# Altium PCB Motor_Driver_2021.PcbDoc
Units mm, origin at the board's own origin, x right, y up, seen from the top; angles counter-clockwise.
Board outline 28.07 x 14 mm, 2 copper layers (Top Layer, Bottom Layer); 22 components, 20 nets, 94 pads, 0 vias.
Unrouted connection lines stored in the file: 6.
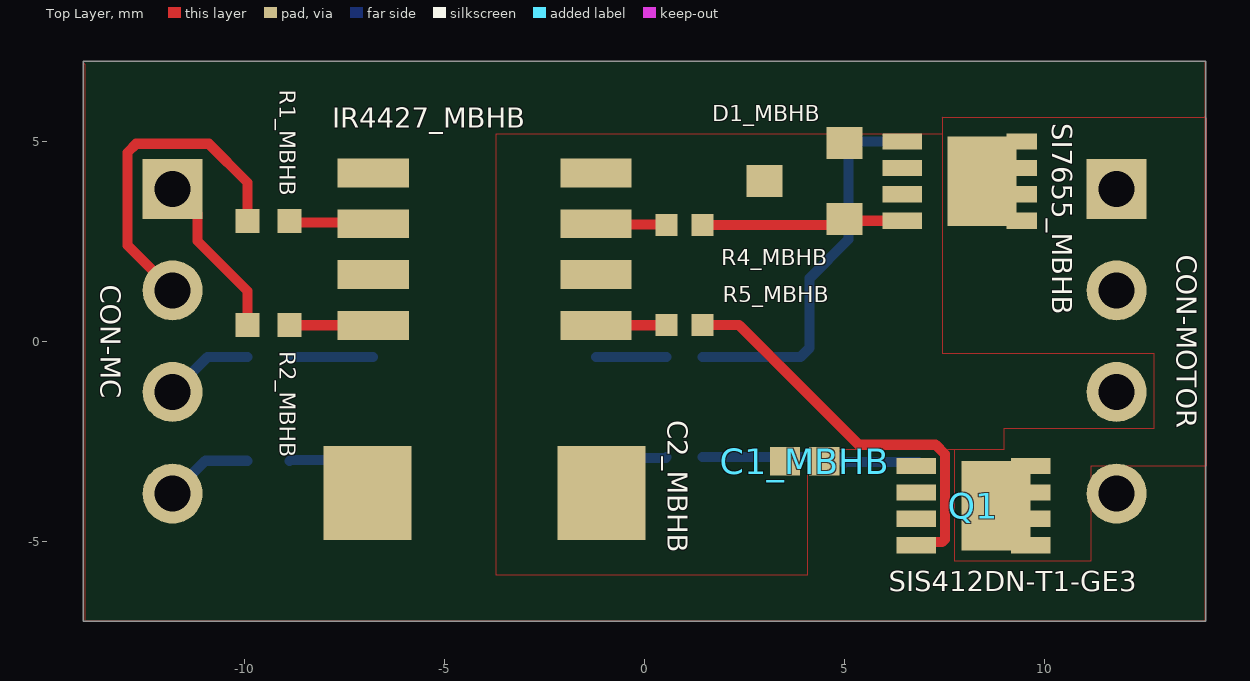
[diagram p0: Top Layer view]
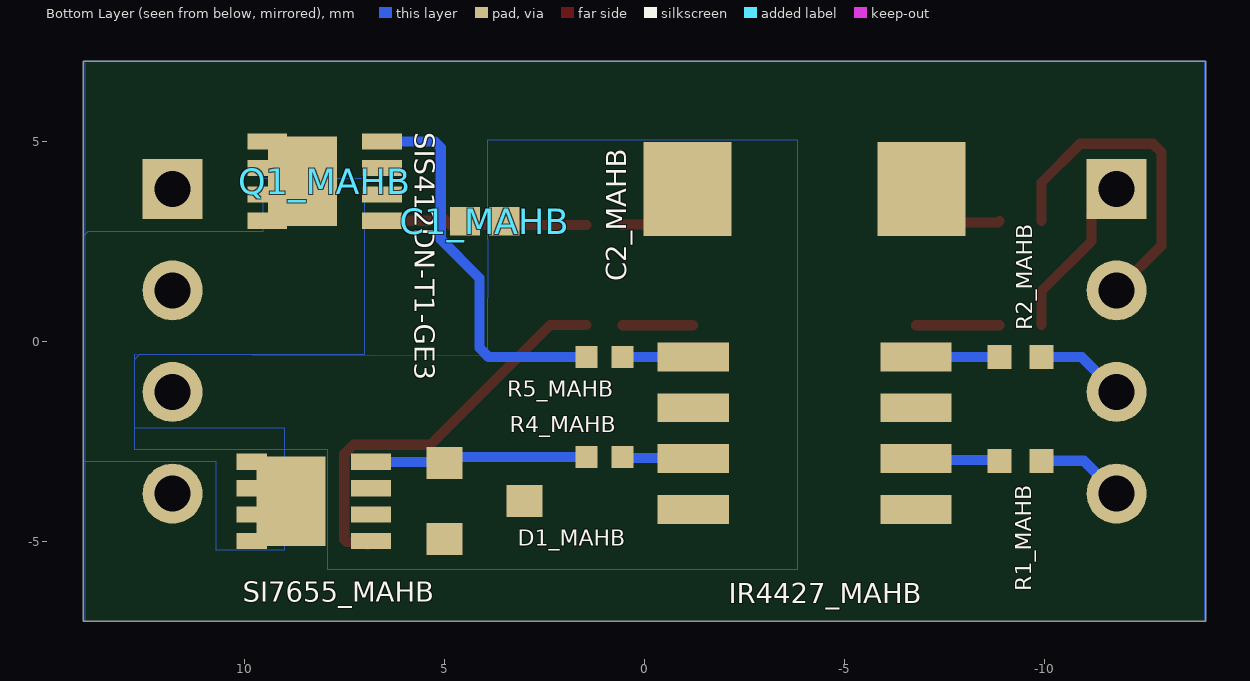
[diagram p1: Bottom Layer view, seen from below]

## Layer stack, top to bottom
Top Solder: solder mask 0.0102, Solder Resist, Dk 3.5
Top Layer: signal copper 0.0356
Dielectric 1: dielectric 0.32, FR-4, Dk 4.8
Bottom Layer: signal copper 0.0356
Bottom Solder: solder mask 0.0102, Solder Resist, Dk 3.5

## Board outline
-14.035,7 -14.035,-7 14.035,-7 14.035,7

## Design rules (kind name [scope] priority, off if disabled: settings)
AssemblyTestPointUsage [All] p0: scope1count=1 scope1_0_kind=Board scope1_0_value=Board scope2count=1 scope2_0_kind=Board scope2_0_value=Board commentlength=0
AssemblyTestpoint [All] p0: scope1count=1 scope1_0_kind=Board scope1_0_value=Board scope2count=1 scope2_0_kind=Board scope2_0_value=Board commentlength=0
Clearance [All] p0: scope1count=1 scope1_0_kind=Board scope1_0_value=Board scope2count=1 scope2_0_kind=Board scope2_0_value=Board commentlength=0 gap=0.1
Clearance [All] p1: gap=0.1 ignorepadtopadclearanceinfootprint=TRUE
ComponentClearance [All] p0: scope1count=1 scope1_0_kind=Board scope1_0_value=Board scope2count=1 scope2_0_kind=Board scope2_0_value=Board commentlength=0 gap=0 collisioncheckmode=3
ComponentClearance [All] p1: gap=0 collisioncheckmode=3 verticalgap=0 showdistances=FALSE
DiffPairsRouting [All] p0: scope1count=1 scope1_0_kind=Board scope1_0_value=Board scope2count=1 scope2_0_kind=Board scope2_0_value=Board commentlength=0
FabricationTestPointUsage [All] p0: scope1count=1 scope1_0_kind=Board scope1_0_value=Board scope2count=1 scope2_0_kind=Board scope2_0_value=Board commentlength=0 valid=0 allowmultiple=FALSE
FabricationTestpoint [All] p0: scope1count=1 scope1_0_kind=Board scope1_0_value=Board scope2count=1 scope2_0_kind=Board scope2_0_value=Board commentlength=0 side=3 testpointundercomponent=TRUE minsize=1.016 maxsize=2.54 preferedsize=1.524 minholesize=0 maxholesize=1.016 preferedholesize=0.813 testpointgrid=0.025
FanoutControl Fanout_BGA [All] p0 off: scope1count=1 scope1_0_kind=Board scope1_0_value=Board scope2count=1 scope2_0_kind=Board scope2_0_value=Board commentlength=69 // Protel DXP Scope 1 Expression Was: IsBGA   Fanout_BGA (Default Rule)
FanoutControl Fanout_LCC [All] p0 off: scope1count=1 scope1_0_kind=Board scope1_0_value=Board scope2count=1 scope2_0_kind=Board scope2_0_value=Board commentlength=69 // Protel DXP Scope 1 Expression Was: IsLCC   Fanout_LCC (Default Rule)
FanoutControl Fanout_SOIC [All] p0 off: scope1count=1 scope1_0_kind=Board scope1_0_value=Board scope2count=1 scope2_0_kind=Board scope2_0_value=Board commentlength=71 // Protel DXP Scope 1 Expression Was: IsSOIC   Fanout_SOIC (Default Rule)
FanoutControl Fanout_Small [All] p0 off: scope1count=1 scope1_0_kind=Board scope1_0_value=Board scope2count=1 scope2_0_kind=Board scope2_0_value=Board commentlength=84 // Protel DXP Scope 1 Expression Was: (CompPinCount < 5)   Fanout_Small (Default Rule)
FanoutControl Fanout_Default [All] p0: scope1count=1 scope1_0_kind=Board scope1_0_value=Board scope2count=1 scope2_0_kind=Board scope2_0_value=Board commentlength=30 // Fanout_Default (Default Rule)
Height [All] p0: scope1count=1 scope1_0_kind=Board scope1_0_value=Board scope2count=1 scope2_0_kind=Board scope2_0_value=Board commentlength=0
HoleSize [All] p0: scope1count=1 scope1_0_kind=Board scope1_0_value=Board scope2count=1 scope2_0_kind=Board scope2_0_value=Board commentlength=0 absolutevalues=TRUE maxlimit=2.54 minlimit=0.025 maxpercent=80.000 minpercent=20.000
HoleToHoleClearance [All] p0: scope1count=1 scope1_0_kind=Board scope1_0_value=Board scope2count=1 scope2_0_kind=Board scope2_0_value=Board commentlength=0
LayerPairs [All] p0: scope1count=1 scope1_0_kind=Board scope1_0_value=Board scope2count=1 scope2_0_kind=Board scope2_0_value=Board commentlength=0 enforce=TRUE
MinimumSolderMaskSliver MinimumSolderMaskSliver_pad_5 [All] p0 off: scope1count=1 scope1_0_kind=Board scope1_0_value=Board scope2count=1 scope2_0_kind=Board scope2_0_value=Board commentlength=80 // Protel DXP Scope 2 Expression Was: (HasFootprint('SIS862DNT1GE3') AND IsPad)
MinimumSolderMaskSliver MinimumSolderMaskSliver_pad_4 [All] p0 off: scope1count=1 scope1_0_kind=Board scope1_0_value=Board scope2count=1 scope2_0_kind=Board scope2_0_value=Board commentlength=79 // Protel DXP Scope 2 Expression Was: (HasFootprint('RESC1005X40N') AND IsPad)
MinimumSolderMaskSliver MinimumSolderMaskSliver_pad_3 [All] p0 off: scope1count=1 scope1_0_kind=Board scope1_0_value=Board scope2count=1 scope2_0_kind=Board scope2_0_value=Board commentlength=88 // Protel DXP Scope 2 Expression Was: (HasFootprint('CAPC1050X55X23ML05T13') AND IsPad)
MinimumSolderMaskSliver MinimumSolderMaskSliver_pad_1 [All] p0 off: scope1count=1 scope1_0_kind=Board scope1_0_value=Board scope2count=1 scope2_0_kind=Board scope2_0_value=Board commentlength=88 // Protel DXP Scope 2 Expression Was: (HasFootprint('RESC1005X40X25LL05T05') AND IsPad)
MinimumSolderMaskSliver MinimumSolderMaskSliver_pad [All] p0 off: scope1count=1 scope1_0_kind=Board scope1_0_value=Board scope2count=1 scope2_0_kind=Board scope2_0_value=Board commentlength=82 // Protel DXP Scope 2 Expression Was: (HasFootprint('POWERPAK-1212-8') AND IsPad)
MinimumSolderMaskSliver MinimumSolderMaskSliver_pad_2 [All] p0 off: scope1count=1 scope1_0_kind=Board scope1_0_value=Board scope2count=1 scope2_0_kind=Board scope2_0_value=Board commentlength=88 // Protel DXP Scope 2 Expression Was: (HasFootprint('RESC1005X40X25NL05T05') AND IsPad)
MinimumSolderMaskSliver [All] p0: scope1count=1 scope1_0_kind=Board scope1_0_value=Board scope2count=1 scope2_0_kind=Board scope2_0_value=Board commentlength=0
MinimumSolderMaskSliver MinimumSolderMaskSliver_pad_2 [(HasFootprint('RESC1005X40X25NL05T05') AND IsPad) vs (HasFootprint('RESC1005X40X25NL05T05') AND IsPad)] p1: minsoldermaskwidth=0
MinimumSolderMaskSliver MinimumSolderMaskSliver_pad_5 [(HasFootprint('SIS862DNT1GE3') AND IsPad) vs (HasFootprint('SIS862DNT1GE3') AND IsPad)] p2: minsoldermaskwidth=0
MinimumSolderMaskSliver MinimumSolderMaskSliver_pad [(HasFootprint('POWERPAK-1212-8') AND IsPad) vs (HasFootprint('POWERPAK-1212-8') AND IsPad)] p3: minsoldermaskwidth=0
MinimumSolderMaskSliver MinimumSolderMaskSliver_pad_1 [(HasFootprint('RESC1005X40X25LL05T05') AND IsPad) vs (HasFootprint('RESC1005X40X25LL05T05') AND IsPad)] p4: minsoldermaskwidth=0
MinimumSolderMaskSliver MinimumSolderMaskSliver_pad_3 [(HasFootprint('CAPC1050X55X23ML05T13') AND IsPad) vs (HasFootprint('CAPC1050X55X23ML05T13') AND IsPad)] p5: minsoldermaskwidth=0
MinimumSolderMaskSliver MinimumSolderMaskSliver_pad_4 [(HasFootprint('RESC1005X40N') AND IsPad) vs (HasFootprint('RESC1005X40N') AND IsPad)] p6: minsoldermaskwidth=0
MinimumSolderMaskSliver [All] p7: minsoldermaskwidth=0.254
NetAntennae [All] p0: scope1count=1 scope1_0_kind=Board scope1_0_value=Board scope2count=1 scope2_0_kind=Board scope2_0_value=Board commentlength=0
PasteMaskExpansion [All] p0: scope1count=1 scope1_0_kind=Board scope1_0_value=Board scope2count=1 scope2_0_kind=Board scope2_0_value=Board commentlength=0 expansion=0
PlaneClearance [All] p0: scope1count=1 scope1_0_kind=Board scope1_0_value=Board scope2count=1 scope2_0_kind=Board scope2_0_value=Board commentlength=0 clearance=0.508
PlaneConnect [All] p0: scope1count=1 scope1_0_kind=Board scope1_0_value=Board scope2count=1 scope2_0_kind=Board scope2_0_value=Board commentlength=0 planeconnectstyle=Relief reliefexpansion=0.508 reliefentries=4 reliefconductorwidth=0.254 reliefairgap=0.254
PolygonConnect "Schematic Polygon Connect Style_1" [All] p0: scope1count=1 scope1_0_kind=Net scope1_0_value=MAOUT scope2count=1 scope2_0_kind=Board scope2_0_value=Board commentlength=0 connectstyle=Direct reliefconductorwidth=0.254 reliefentries=4 polygonreliefangle="45 Angle"
PolygonConnect "Schematic Polygon Connect Style" [All] p0: scope1count=1 scope1_0_kind=Net scope1_0_value=MBOUT scope2count=1 scope2_0_kind=Board scope2_0_value=Board commentlength=0 connectstyle=Direct reliefconductorwidth=0.254 reliefentries=4 polygonreliefangle="45 Angle"
PolygonConnect [All] p0: scope1count=1 scope1_0_kind=Board scope1_0_value=Board scope2count=1 scope2_0_kind=Board scope2_0_value=Board commentlength=0 connectstyle=Direct reliefconductorwidth=0.254 reliefentries=4 polygonreliefangle="90 Angle"
PolygonConnect "Schematic Polygon Connect Style_1" [InNet('MAOUT')] p1: connectstyle=Direct reliefconductorwidth=0.254 reliefentries=4 polygonreliefangle="45 Angle" airgapwidth=0.254
PolygonConnect "Schematic Polygon Connect Style" [InNet('MBOUT')] p2: connectstyle=Direct reliefconductorwidth=0.254 reliefentries=4 polygonreliefangle="45 Angle" airgapwidth=0.254
PolygonConnect [All] p3: connectstyle=Direct reliefconductorwidth=0.254 reliefentries=4 polygonreliefangle="90 Angle" airgapwidth=0.254
RoutingCorners [All] p0: scope1count=1 scope1_0_kind=Board scope1_0_value=Board scope2count=1 scope2_0_kind=Board scope2_0_value=Board commentlength=0 cornerstyle=45-Degree minsetback=2.54 maxsetback=2.54
RoutingLayers [All] p0: scope1count=1 scope1_0_kind=Board scope1_0_value=Board scope2count=1 scope2_0_kind=Board scope2_0_value=Board commentlength=0 top layer=Automatic bottom layer=Automatic
RoutingPriority [All] p0: scope1count=1 scope1_0_kind=Board scope1_0_value=Board scope2count=1 scope2_0_kind=Board scope2_0_value=Board commentlength=0
RoutingTopology [All] p0: scope1count=1 scope1_0_kind=Board scope1_0_value=Board scope2count=1 scope2_0_kind=Board scope2_0_value=Board commentlength=0 topology=Shortest
RoutingVias [All] p0: scope1count=1 scope1_0_kind=Board scope1_0_value=Board scope2count=1 scope2_0_kind=Board scope2_0_value=Board commentlength=0 holewidth=0.711 width=1 viastyle="Through Hole" minholewidth=0.711 minwidth=1 maxholewidth=0.711 maxwidth=1
RoutingVias [All] p1: holewidth=0.711 width=1 viastyle="Through Hole" minholewidth=0.711 minwidth=1 maxholewidth=0.711 maxwidth=1
ShortCircuit [All] p0: scope1count=1 scope1_0_kind=Board scope1_0_value=Board scope2count=1 scope2_0_kind=Board scope2_0_value=Board commentlength=0 allowed=FALSE
SilkToBoardRegionClearance [All] p0: scope1count=1 scope1_0_kind=Board scope1_0_value=Board scope2count=1 scope2_0_kind=Board scope2_0_value=Board commentlength=0
SilkToSilkClearance [All] p0: scope1count=1 scope1_0_kind=Board scope1_0_value=Board scope2count=1 scope2_0_kind=Board scope2_0_value=Board commentlength=0
SilkToSolderMaskClearance [All] p0 off: scope1count=1 scope1_0_kind=Board scope1_0_value=Board scope2count=1 scope2_0_kind=Board scope2_0_value=Board commentlength=44 // Protel DXP Scope 1 Expression Was: IsPad
SolderMaskExpansion [All] p0: scope1count=1 scope1_0_kind=Board scope1_0_value=Board scope2count=1 scope2_0_kind=Board scope2_0_value=Board commentlength=0 expansion=0.102
SolderMaskExpansion [All] p1: expansion=0.102 istentingtop=FALSE
UnRoutedNet [All] p0: scope1count=1 scope1_0_kind=Board scope1_0_value=Board scope2count=1 scope2_0_kind=Board scope2_0_value=Board commentlength=0
UnpouredPolygon [All] p0: scope1count=1 scope1_0_kind=Board scope1_0_value=Board scope2count=1 scope2_0_kind=Board scope2_0_value=Board commentlength=0
Width [All] p0: scope1count=1 scope1_0_kind=Board scope1_0_value=Board scope2count=1 scope2_0_kind=Board scope2_0_value=Board commentlength=0 maxlimit=0.254 minlimit=0.254 preferedwidth=0.254
Width [All] p1: maxlimit=0.254 minlimit=0.254 preferedwidth=0.254
28 further rules are at their usual default settings.

## Classes and differential pairs
channel class Half_Bridge: MAHB MBHB
component class Motor_Driver_2021: CON-MC CON-MOTOR
component class MBHB: C1_MBHB C2_MBHB D1_MBHB IR4427_MBHB R1_MBHB R2_MBHB R4_MBHB R5_MBHB
component class MAHB: C1_MAHB C2_MAHB D1_MAHB IR4427_MAHB Q1_MAHB R1_MAHB R2_MAHB R4_MAHB R5_MAHB SI7655_MAHB

## Components (designator, comment, footprint, x,y, rotation, side; value= is the part's Value field where it differs from the comment)
C1_MAHB "CL05B104KO5NNNC" CAPC1050X55X23ML05T13 4,3 r180 bottom (schematic designator C1)
C1_MBHB "CL05B104KO5NNNC" CAPC1050X55X23ML05T13 4,-3 r180 top (schematic designator C1)
C2_MAHB "T491D475M050AT" KEMT-T491-D_L -4,3.8 r180 bottom (schematic designator C2)
C2_MBHB "T491D475M050AT" KEMT-T491-D_L -4,-3.8 r180 top (schematic designator C2)
CON-MC "" 04x01_Conector_Male -11.8,0 r90 top
CON-MOTOR "22032041" 04x01_Conector_Male 11.8,0 r90 top
D1_MAHB "MMBZ5240B-7-F" Diodes_SOT23_0 4,-4 r270 bottom (schematic designator D1)
D1_MBHB "MMBZ5240B-7-F" Diodes_SOT23_0 4,4 r90 top (schematic designator D1)
IR4427_MAHB "IR4427STRPBF" IR4427-PCB -4,-2.3 r0 bottom (schematic designator IR4427)
IR4427_MBHB "IR4427STRPBF" IR4427-PCB -4,2.3 r0 top (schematic designator IR4427)
Q1 "SIS412DN-T1-GE3" POWERPAK-1212-8 8.223,-4.11 r0 top
Q1_MAHB "SIS412DN-T1-GE3" POWERPAK-1212-8 8,4 r0 bottom (schematic designator Q1)
R1_MAHB "CRCW0402330RFKED" FP-CRCW0402-e3-MFG -9.4,-3 r0 bottom (schematic designator R1)
R1_MBHB "CRCW0402330RFKED" FP-CRCW0402-e3-MFG -9.4,3 r0 top (schematic designator R1)
R2_MAHB "CRCW0402330RFKED" FP-CRCW0402-e3-MFG -9.4,-0.4 r0 bottom (schematic designator R2)
R2_MBHB "CRCW0402330RFKED" FP-CRCW0402-e3-MFG -9.4,0.4 r0 top (schematic designator R2)
R4_MAHB "ERJ-2RKF1500X" RESC1005X40X25NL05T05 1,-2.9 r0 bottom (schematic designator R4)
R4_MBHB "ERJ-2RKF1500X" RESC1005X40X25NL05T05 1,2.9 r0 top (schematic designator R4)
R5_MAHB "ERJ-2RKF1500X" RESC1005X40X25NL05T05 1,-0.4 r0 bottom (schematic designator R5)
R5_MBHB "ERJ-2RKF1500X" RESC1005X40X25NL05T05 1,0.4 r0 top (schematic designator R5)
SI7655_MAHB "SI7655DN-T1-GE3" SIS862DNT1GE3 8.395,-4.003 r0 bottom (schematic designator SI7655)
SI7655_MBHB "SI7655DN-T1-GE3" SIS862DNT1GE3 8,4 r0 top (schematic designator SI7655)

## Footprints (in the part's own frame and the unit in brackets; to place one, negate y for a bottom-side part, rotate by r counter-clockwise, add the part's x,y. Pads: shape width x height; smd on the part's side, far side on the other; paste and mask are expansions set on the pad)
04x01_Conector_Male [mm] "0022032041"
  rect 1.5x1.5 hole 0.9: 1(3.81,0)
  round 1.5 hole 0.9: 2(1.27,0) 3(-1.27,0) 4(-3.81,0)
CAPC1050X55X23ML05T13 [mm] "Chip Capacitor, 2-Leads, Body 1.05x0.55mm, IPC Low Density"
  rect 0.76x0.72 smd: 1(-0.49,0) 2(0.49,0)
Diodes_SOT23_0 [mm]
  rect 0.8x0.9 smd paste+0 mask+0: 1(0,1) 2(-0.95,-1) 3(0.95,-1)
FP-CRCW0402-e3-MFG [mm]
  rect 0.6x0.6 smd paste+0 mask+0: 1(-0.525,0) 2(0.525,0)
IR4427-PCB [mm] "SOIC, 8-Leads, Body 4,85x3,90mm, Pitch 1,27mm, IPC Medium Density"
  rect 1.78x0.72 smd: 1(-2.785,1.905) 2(-2.785,0.635) 3(-2.785,-0.635) 4(-2.785,-1.905) 5(2.785,-1.905) 6(2.785,-0.635) 7(2.785,0.635) 8(2.785,1.905)
KEMT-T491-D_L [mm] "Molded Capacitor, 2-Leads, Body 7.60x4.60mm, IPC High Density"
  rect 2.2x2.35 smd: 1(-2.925,0) 2(2.925,0)
POWERPAK-1212-8 [mm]
  rect 0.99x0.405 smd: 1(-1.435,0.99) 2(-1.435,0.33) 3(-1.435,-0.33) 4(-1.435,-0.99) 5(1.435,-0.99) 6(1.435,-0.33) 7(1.435,0.33) 8(1.435,0.99)
  rect 1.725x2.235 smd: 9(0.557,0)
RESC1005X40X25NL05T05 [mm] "Chip Resistor, 2-Leads, Body 1.00x0.50mm, IPC Medium Density"
  rect 0.55x0.55 smd: 1(-0.45,0) 2(0.45,0)
SIS862DNT1GE3 [mm]
  rect 0.99x0.405 smd: 1(-1.555,0.992) 2(-1.555,0.332) 3(-1.555,-0.328) 4(-1.555,-0.988)
  rect 0.51x0.405 smd: 5(1.555,-0.988) 6(1.555,-0.328) 7(1.555,0.332) 8(1.555,0.992)
  rect 1.725x2.235 smd: 9(0.438,0.002)
  rect 0.25x0.077 smd: 10(1.175,-1.156) 11(1.175,1.156)

## Part data
C1_MAHB C1_MBHB: library part CMP-2000-05439-1, "Chip Capacitor, 100 nF, +/- 10%, 16 V, -55 to 125 degC, 0402 (1005 Metric), RoHS, Tape and Reel"
C2_MAHB C2_MBHB: library part CMP-2000-07203-1, "Tantalum Surface Mount Capacitor, 4.7 uF, +/- 20%, 50 V, -55 to 125 degC, 2-Pin SMD, RoHS, Tape and Reel"
CON-MC CON-MOTOR: library part 04x01_Conector_Male-SCH, "CONN HEADER 4POS .100 VERT TIN"
IR4427_MAHB IR4427_MBHB: library part IR4427, "IC DRIVER DUAL LOW SIDE 8-DIP"
Q1 Q1_MAHB: "MOSFET (N-Channel)"
R1_MAHB R1_MBHB R2_MAHB R2_MBHB: library part CMP-2002-08523-2, "RES Thick Film, 330O, 1%, 0.063W, 100ppm/°C, 0402"
R4_MAHB R4_MBHB R5_MAHB R5_MBHB: library part CMP-1011-00415-2
SI7655_MAHB SI7655_MBHB: "MOSFET (P-Channel)"

## Nets (pads, with @x,y where several pads share a name; then routed paths per layer and width w, separated by ;. In a path a pad name is that pad's centre, name@x,y a point inside that pad or via, vN(x,y) a via of type N, cw(c..) or ccw(c..) an arc to the next point about the centre after c; other vN are vias at no path point)
GND: C1_MAHB.1 C1_MBHB.1 C2_MAHB.2 C2_MBHB.2 CON-MOTOR.4 IR4427_MAHB.3 IR4427_MBHB.3 Q1.1 Q1.2 Q1.3 Q1_MAHB.1 Q1_MAHB.2 Q1_MAHB.3
MAHIN: CON-MC.4 R1_MAHB.1 | length 2.2
  Bottom Layer w0.254: CON-MC.4 -10.98,-2.99 -9.935,-2.99 R1_MAHB.1
MALIN: CON-MC.3 R2_MAHB.1 | length 2.2
  Bottom Layer w0.254: CON-MC.3 -10.93,-0.4 R2_MAHB.1
MAOUT: CON-MOTOR.2 Q1_MAHB.5 Q1_MAHB.6 Q1_MAHB.7 Q1_MAHB.8 Q1_MAHB.9 SI7655_MAHB.5 SI7655_MAHB.6 SI7655_MAHB.7 SI7655_MAHB.8 SI7655_MAHB.9 SI7655_MAHB.10 SI7655_MAHB.11
MBHIN: CON-MC.2 R1_MBHB.1 | length 8.4
  Top Layer w0.254: CON-MC.2 -12.927,2.397 -12.927,4.716 -12.706,4.937 -10.894,4.937 -9.925,3.968 R1_MBHB.1
MBLIN: CON-MC.1 R2_MBHB.1 | length 4.2
  Top Layer w0.254: CON-MC.1 -11.177,3.187 -11.177,2.506 -9.925,1.254 R2_MBHB.1
MBOUT: CON-MOTOR.1 Q1.5 Q1.6 Q1.7 Q1.8 Q1.9 SI7655_MBHB.5 SI7655_MBHB.6 SI7655_MBHB.7 SI7655_MBHB.8 SI7655_MBHB.9 SI7655_MBHB.10 SI7655_MBHB.11
NetD1_MAHB_2: D1_MAHB.2 R4_MAHB.2 SI7655_MAHB.4 | length 5.5
  Bottom Layer w0.254: R4_MAHB.2 4.85,-2.9 D1_MAHB.2 5.028,-3.022 SI7655_MAHB.4@6.845,-3.022
NetD1_MBHB_2: D1_MBHB.2 R4_MBHB.2 SI7655_MBHB.4 | length 5.1
  Top Layer w0.254: R4_MBHB.2 4.85,2.9 D1_MBHB.2 5.038,3.012 SI7655_MBHB.4
NetIR4427_MAHB_2: IR4427_MAHB.2 R1_MAHB.2 | length 2.1
  Bottom Layer w0.254: R1_MAHB.2 -8.842,-2.967 -6.817,-2.967 IR4427_MAHB.2
NetIR4427_MAHB_4: IR4427_MAHB.4 R2_MAHB.2 | length 2.1
  Bottom Layer w0.254: R2_MAHB.2 -8.872,-0.397 -6.787,-0.397 IR4427_MAHB.4
NetIR4427_MAHB_5: IR4427_MAHB.5 R5_MAHB.1 | length 1.8
  Bottom Layer w0.254: IR4427_MAHB.5 -1.213,-0.397 0.548,-0.397 R5_MAHB.1
NetIR4427_MAHB_7: IR4427_MAHB.7 R4_MAHB.1 | length 1.8
  Bottom Layer w0.254: IR4427_MAHB.7 -1.198,-2.917 0.533,-2.917 R4_MAHB.1
NetIR4427_MBHB_2: IR4427_MBHB.2 R1_MBHB.2 | length 2.1
  Top Layer w0.254: R1_MBHB.2 -8.842,2.967 -6.817,2.967 IR4427_MBHB.2
NetIR4427_MBHB_4: IR4427_MBHB.4 R2_MBHB.2 | length 2.1
  Top Layer w0.254: R2_MBHB.2 -8.872,0.397 -6.787,0.397 IR4427_MBHB.4
NetIR4427_MBHB_5: IR4427_MBHB.5 R5_MBHB.1 | length 1.8
  Top Layer w0.254: IR4427_MBHB.5 -1.213,0.397 0.548,0.397 R5_MBHB.1
NetIR4427_MBHB_7: IR4427_MBHB.7 R4_MBHB.1 | length 1.8
  Top Layer w0.254: IR4427_MBHB.7 -1.198,2.917 0.533,2.917 R4_MBHB.1
NetQ1_MAHB_4: Q1_MAHB.4 R5_MAHB.2 | length 9.7
  Bottom Layer w0.254: R5_MAHB.2 3.896,-0.4 4.128,-0.169 4.128,1.577 5.097,2.546 5.097,4.841 5.246,4.99 Q1_MAHB.4
NetQ1_MBHB_4: Q1.4 R5_MBHB.2 | length 10.2
  Top Layer w0.254: R5_MBHB.2 2.363,0.4 5.353,-2.59 7.276,-2.59 7.509,-2.823 7.509,-4.951 7.436,-5.024 7.009,-5.024 Q1.4@6.934,-5.1
VCC: C1_MAHB.2 C1_MBHB.2 C2_MAHB.1 C2_MBHB.1 CON-MOTOR.3 D1_MAHB.1 D1_MBHB.1 IR4427_MAHB.6 IR4427_MBHB.6 SI7655_MAHB.1 SI7655_MAHB.2 SI7655_MAHB.3 SI7655_MBHB.1 SI7655_MBHB.2 SI7655_MBHB.3
pads on no net: D1_MAHB.3 D1_MBHB.3 IR4427_MAHB.1 IR4427_MAHB.8 IR4427_MBHB.1 IR4427_MBHB.8

## Polygon pours and split planes (outlines as drawn)
GND on Bottom Layer "GND_L02_P018" (solid, pour order 18): -14,7 14,7 14,-7 -14,-7
VCC on Bottom Layer "VCC_L02_P011" (solid, pour order 11): 3.92,2.55 3.92,5.03 -3.82,5.03 -3.82,-5.72 7.92,-5.72 7.92,-2.71 12.74,-2.71 12.74,-0.33 3.92,-0.368 3.91,2.53
MAOUT on Bottom Layer "MAOUT_L02_P008" (solid, pour order 8): 9.55,-5.21 8.99,-5.21 8.99,-3.38 8.99,-3.31 8.96,-3.28 8.99,-3.25 8.99,-2.18 12.74,-2.18 12.74,-0.448 12.621,-0.33 7,-0.33 7,4.063 9.55,4.063 9.55,2.74 13.918,2.74 14.03,2.628 14.03,-2.968 14,-2.998 10.718,-2.998 10.718,-5.21
MBOUT on Top Layer "MBOUT_L01_P021" (solid, pour order 21): 13.992,5.6 14,5.608 14.04,5.568 14.04,-3.13 11.157,-3.13 11.157,-5.508 7.75,-5.508 7.75,-2.7 8.99,-2.7 8.99,-2.18 12.74,-2.18 12.74,-0.32 7.45,-0.32 7.45,5.59 7.44,5.6
GND on Top Layer "GND_L01_P019" (solid, pour order 19): -14,7 14,7 14,-7 -13.98,-6.98 -13.98,6.91 -14.02,6.95
VCC on Top Layer "VCC_L01_P020" (solid, pour order 20): -3.718,5.168 -3.718,-5.84 4.078,-5.84 4.078,-2.7 4.992,-2.7 8.99,-2.7 8.99,-2.18 12.74,-2.18 12.74,-0.32 7.45,-0.32 7.45,5.168

## Text inside footprints (layer, text, board x,y; h text height)
R2_MAHB: Top Component Center "22032041" at -12.727,-7.226 h1.52